# Altium PCB HDR-TH_40P-P1.27-V-M-R2-C20-S1.27.pcbdoc
Units mil, origin at the board's own origin, x right, y up, seen from the top; angles counter-clockwise.
Board outline 1502.36 x 640 mil, 2 copper layers (Top Layer, Bottom Layer); 1 components, 0 nets, 40 pads, 0 vias.
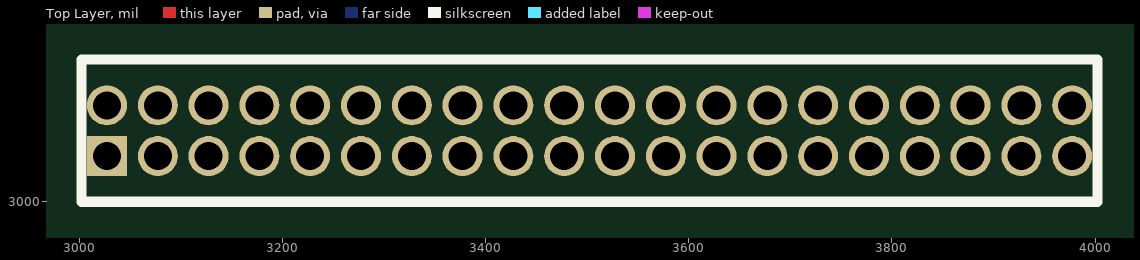
[diagram p0: Top Layer view]
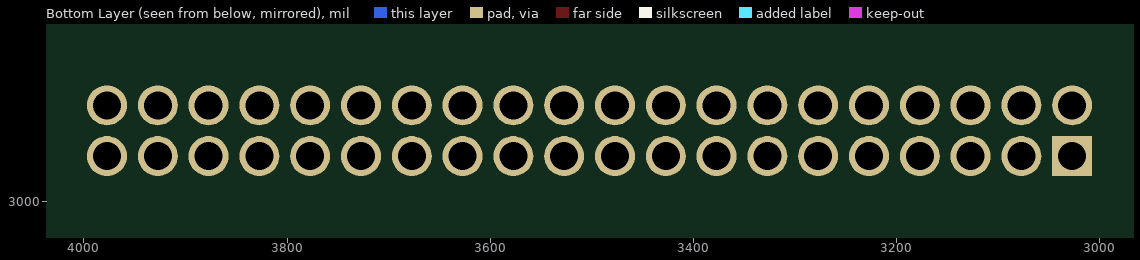
[diagram p1: Bottom Layer view, seen from below]

## Layer stack, top to bottom
Top Layer: signal copper (thickness not stored)
Dielectric: dielectric 12.6, FR-4, Dk 4.8
Bottom Layer: signal copper (thickness not stored)

## Board outline
4252.36,2750 2750,2750 2750,3390 4252.36,3390

## Design rules (kind name [scope] priority, off if disabled: settings)
Clearance safeClearance [All] p1: gap=7 ignorepadtopadclearanceinfootprint=FALSE except(6: Track-Track Track-SMDPad SMDPad-SMDPad Track-THPad SMDPad-THPad THPad-THPad Track-Via SMDPad-Via THPad-Via Via-Via Track-Fill SMDPad-Fill THPad-Fill Via-Fill Fill-Fill Track-Region SMDPad-Region THPad-Region Via-Region Fill-Region Region-Region Track-Poly SMDPad-Poly THPad-Poly Via-Poly Fill-Poly Region-Poly Poly-Poly Track-Text SMDPad-Text THPad-Text Via-Text Fill-Text Region-Text Poly-Text Text-Text; 6.9: Track-Hole SMDPad-Hole THPad-Hole Via-Hole Fill-Hole Region-Hole Poly-Hole Text-Hole Sheet-Hole; 11.8: Track-Sheet SMDPad-Sheet THPad-Sheet Via-Sheet Fill-Sheet Region-Sheet Poly-Sheet Text-Sheet)
DiffPairsRouting differentialPair [All] p1: maxuncoupledlength=10 minlimit=6 maxlimit=50 mostfreqgap=6 toplayer_minwidth=5 toplayer_prefwidth=10 toplayer_maxwidth=100 bottomlayer_minwidth=5 bottomlayer_prefwidth=10 bottomlayer_maxwidth=100
PasteMaskExpansion pasteMaskExpansion [All] p1:
PlaneConnect innerPlane [All] p1: planeconnectstyle=Relief reliefexpansion=20 reliefentries=4 reliefconductorwidth=10 reliefairgap=10
PolygonConnect copperRegion [All] p1: connectstyle=Relief reliefentries=4 reliefconductorwidth=10 polygonreliefangle="90 Angle" airgapwidth=10
RoutingVias viaSize [All] p1: viastyle="Through Hole" holewidth=12.0078 minholewidth=11.811 maxholewidth=236.2204 width=24.0158 minwidth=19.685 maxwidth=393.7008
SolderMaskExpansion solderMaskExpansion [All] p1: useseparateexpansions=TRUE expansion=2 expansionbottom=2
Width trackWidth [All] p1: maxlimit=100 minlimit=5 preferedwidth=10

## Components (designator, comment, footprint, x,y, rotation, side; value= is the part's Value field where it differs from the comment)
? "HDR-TH_40P-P1.27-V-M-R2-C20-S1.27" HDR-TH_40P-P1.27-V-M-R2-C20-S1.27 3502.36,3070 r0 top

## Footprints (in the part's own frame and the unit in brackets; to place one, negate y for a bottom-side part, rotate by r counter-clockwise, add the part's x,y. Pads: shape width x height; smd on the part's side, far side on the other; paste and mask are expansions set on the pad)
HDR-TH_40P-P1.27-V-M-R2-C20-S1.27 [mm]
  rect 1x1 hole 0.7: 1(-12.065,-0.635)
  round 1 hole 0.7: 2(-12.065,0.635) 3(-10.795,-0.635) 4(-10.795,0.635) 5(-9.525,-0.635) 6(-9.525,0.635) 7(-8.255,-0.635) 8(-8.255,0.635) 9(-6.985,-0.635) 10(-6.985,0.635) 11(-5.715,-0.635) 12(-5.715,0.635) 13(-4.445,-0.635) 14(-4.445,0.635) 15(-3.175,-0.635) 16(-3.175,0.635) 17(-1.905,-0.635) 18(-1.905,0.635) 19(-0.635,-0.635) 20(-0.635,0.635) 21(0.635,-0.635) 22(0.635,0.635) 23(1.905,-0.635) 24(1.905,0.635) 25(3.175,-0.635) 26(3.175,0.635) 27(4.445,-0.635) 28(4.445,0.635) 29(5.715,-0.635) 30(5.715,0.635) 31(6.985,-0.635) 32(6.985,0.635) 33(8.255,-0.635) 34(8.255,0.635) 35(9.525,-0.635) 36(9.525,0.635) 37(10.795,-0.635) 38(10.795,0.635) 39(12.065,-0.635) 40(12.065,0.635)
  silkscreen extent -12.7,-1.78 12.7,1.78

## Nets (pads, with @x,y where several pads share a name; then routed paths per layer and width w, separated by ;. In a path a pad name is that pad's centre, name@x,y a point inside that pad or via, vN(x,y) a via of type N, cw(c..) or ccw(c..) an arc to the next point about the centre after c; other vN are vias at no path point)
pads on no net: ?.1 ?.2 ?.3 ?.4 ?.5 ?.6 ?.7 ?.8 ?.9 ?.10 ?.11 ?.12 ?.13 ?.14 ?.15 ?.16 ?.17 ?.18 ?.19 ?.20 ?.21 ?.22 ?.23 ?.24 ?.25 ?.26 ?.27 ?.28 ?.29 ?.30 ?.31 ?.32 ?.33 ?.34 ?.35 ?.36 ?.37 ?.38 ?.39 ?.40